# Altium PCB A3000_8MB.pcbdoc (part 1 of 3)
Units mil, origin at the board's own origin, x right, y up, seen from the top; angles counter-clockwise.
Board outline 6950 x 3881 mil, 4 copper layers (TopLayer, GND, VCC, BottomLayer), stack 70.897 mil thick; 83 components, 216 nets, 829 pads, 490 vias.
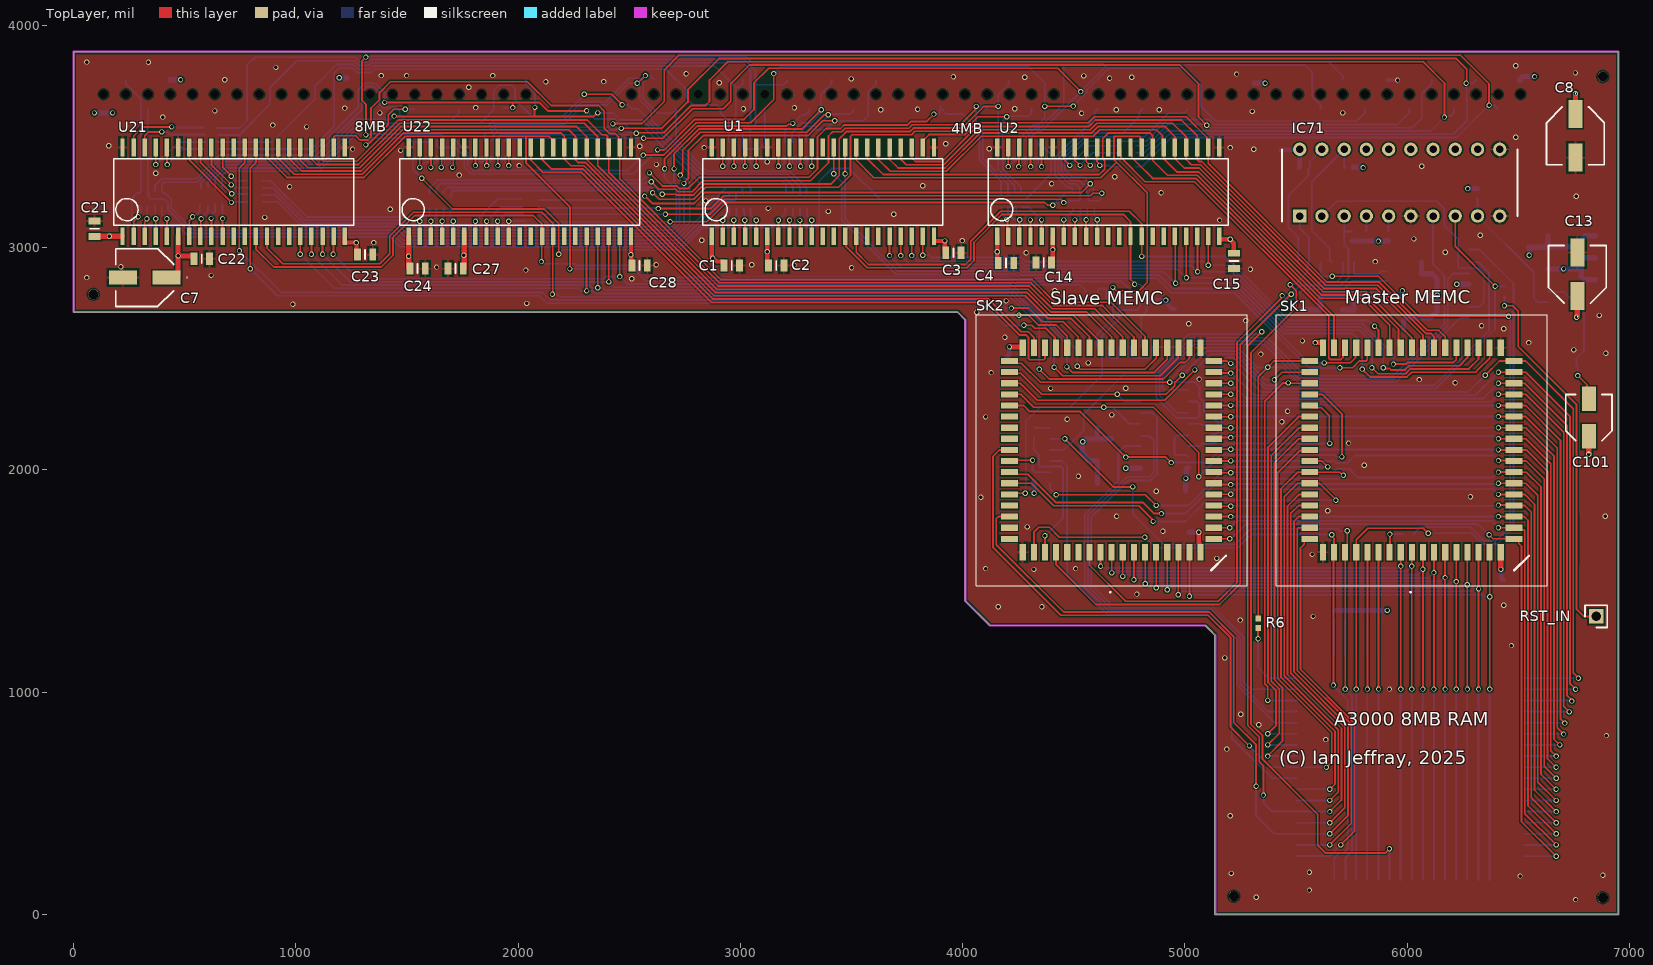
[diagram p0: TopLayer view]
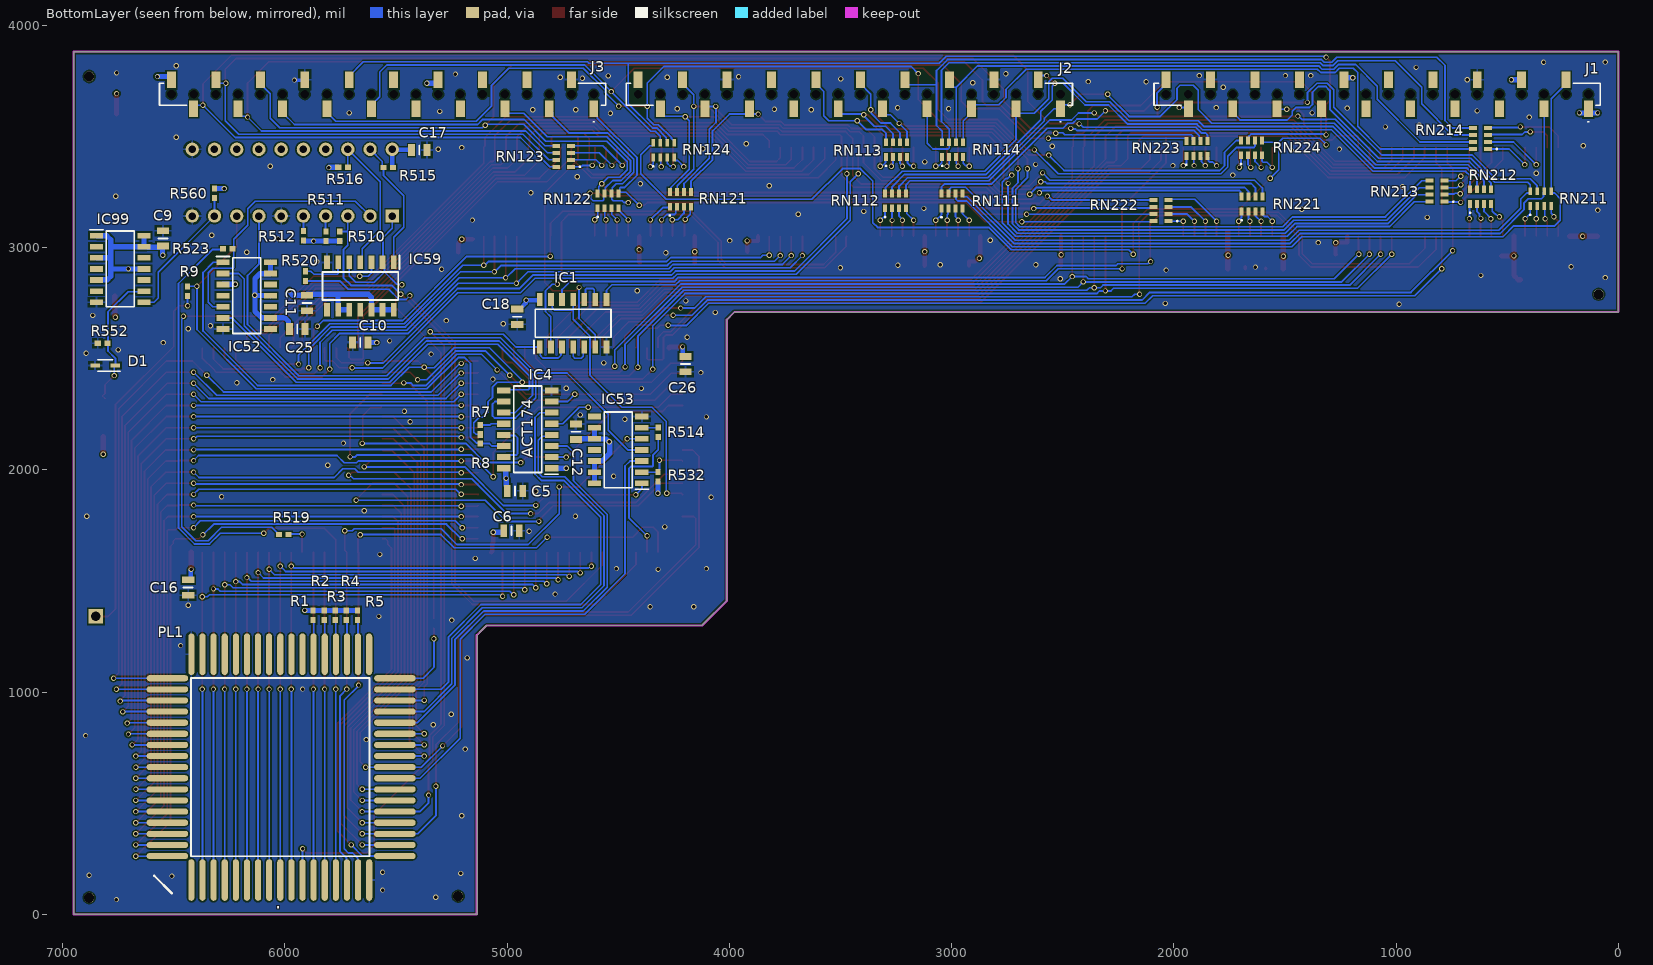
[diagram p1: BottomLayer view, seen from below]
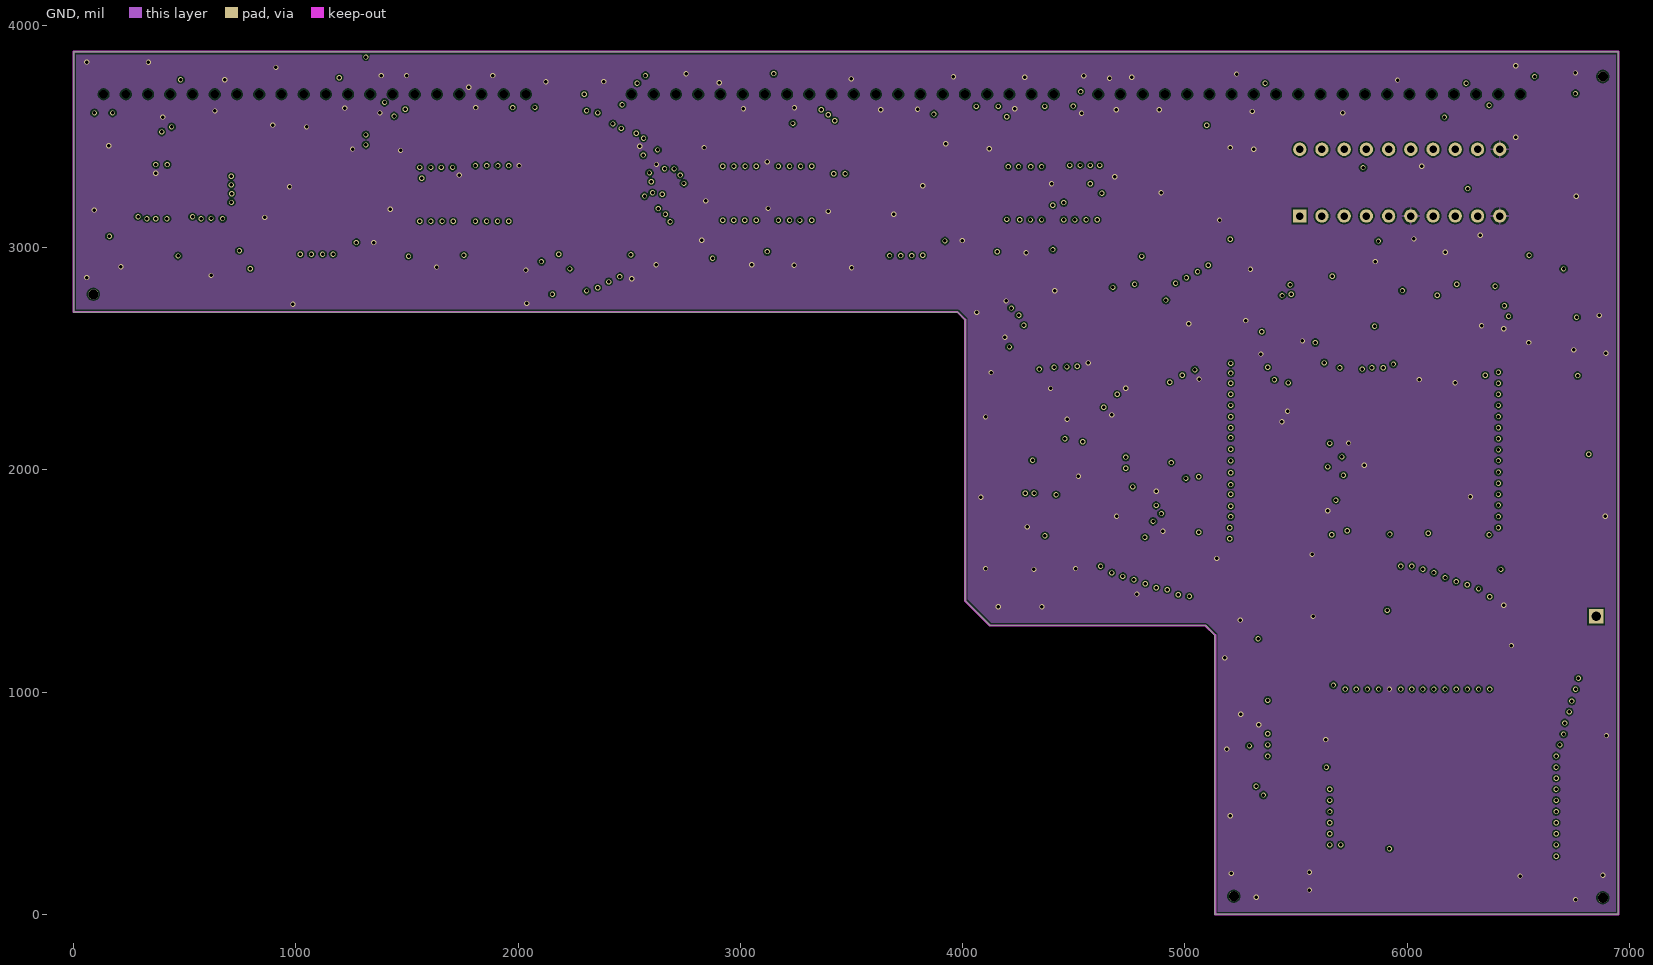
[diagram p2: GND]
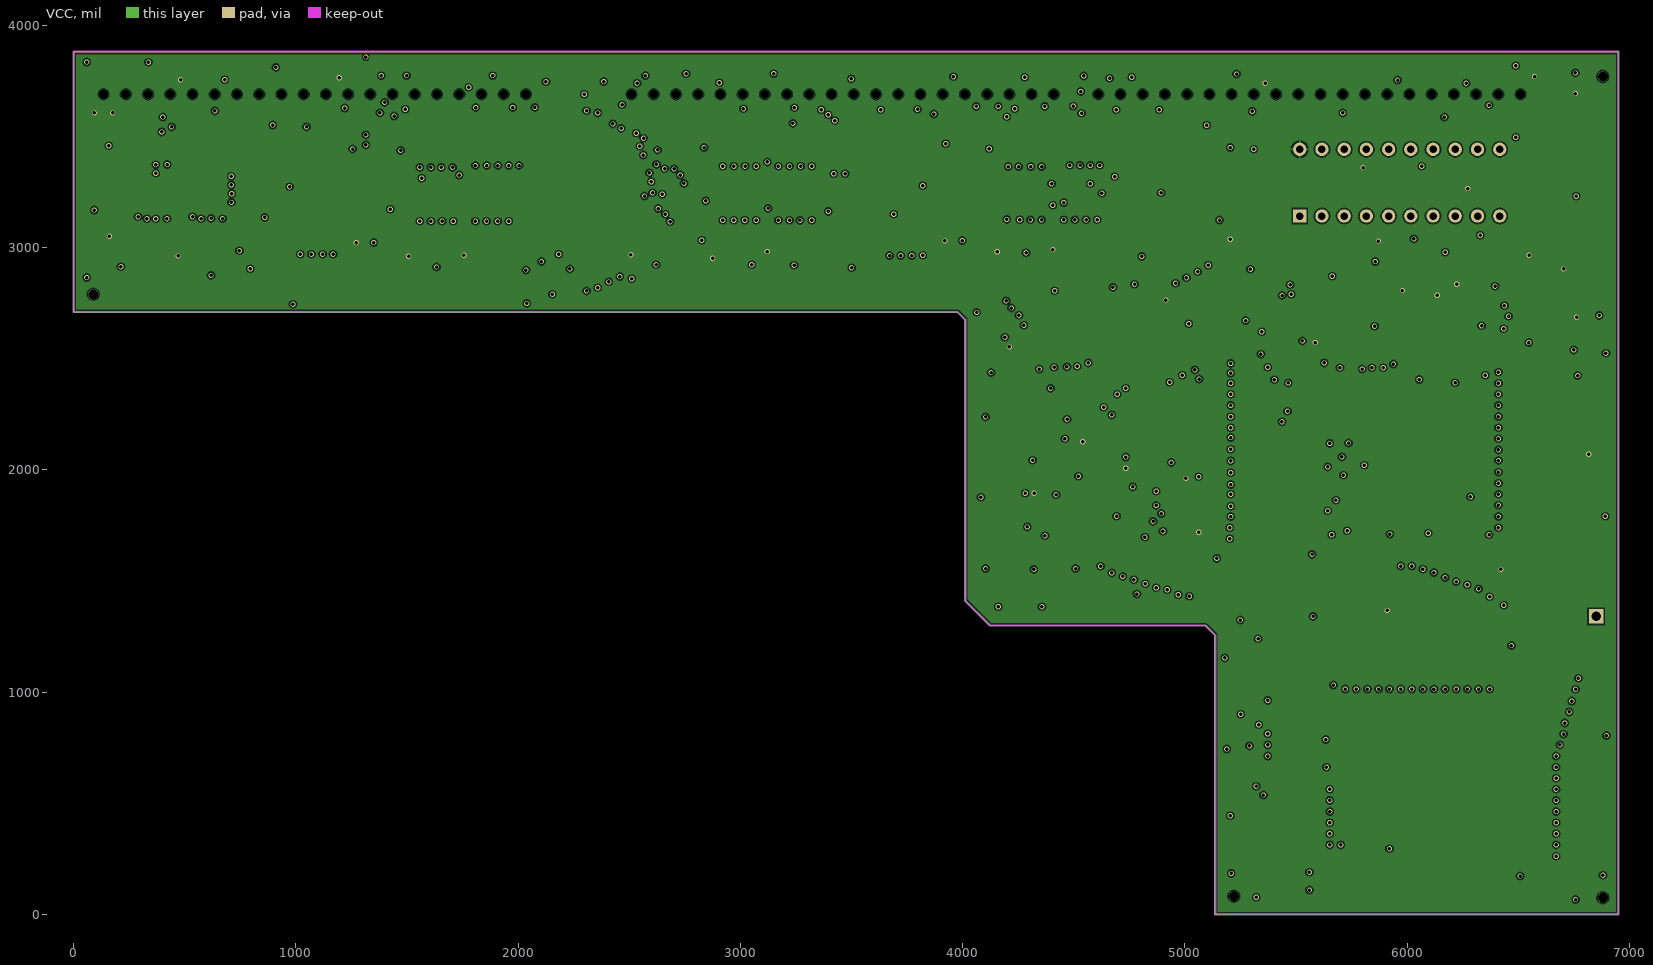
[diagram p3: VCC]
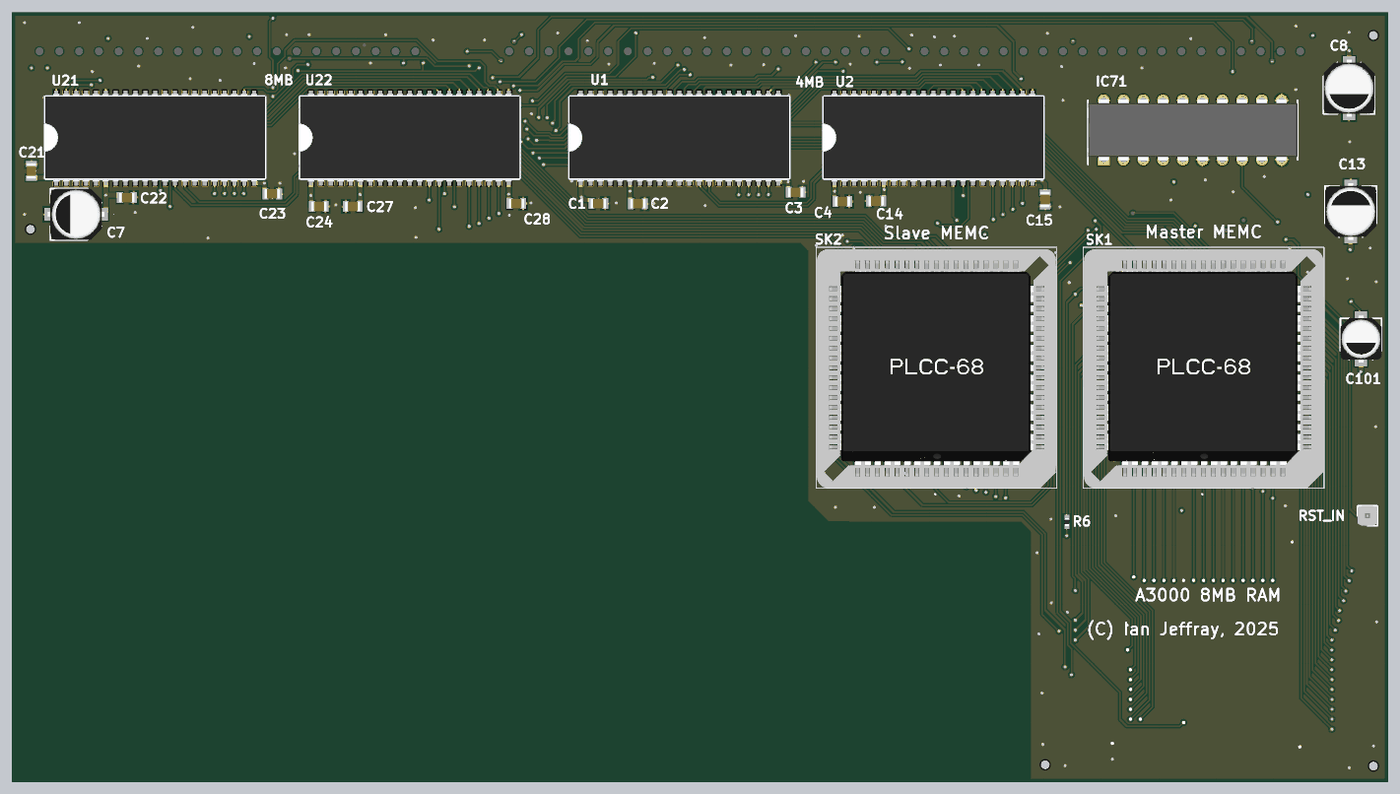
[diagram p6: 3D render of the assembled board from above, using the file's embedded part models]
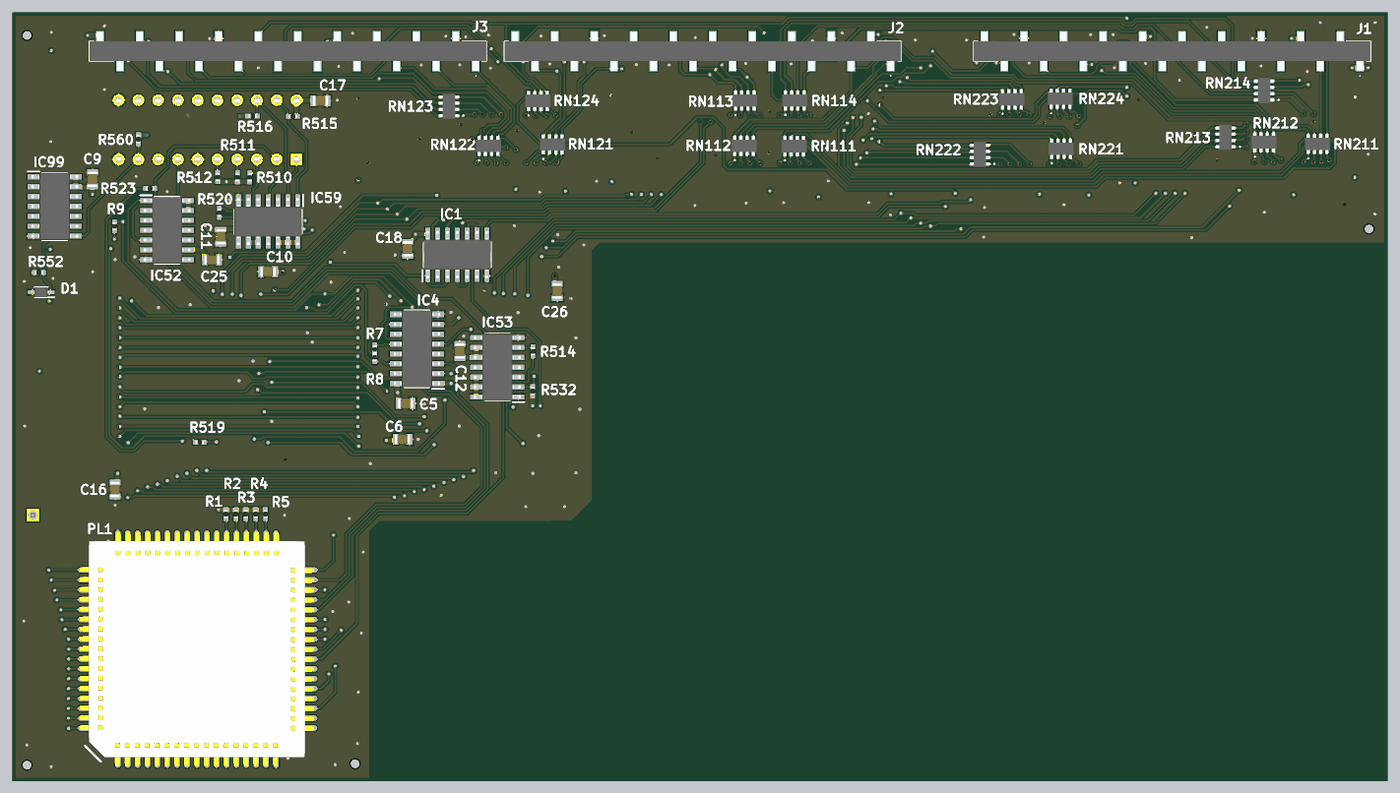
[diagram p7: 3D render of the assembled board from below, using the file's embedded part models]

## Layer stack, top to bottom
TopSolder: solder mask 0.3941, Solder Resist, Dk 3.5
TopLayer: signal copper 1.4169
Dielectric 1: prepreg 8.2, PP-022, Dk 4.5
GND: signal copper 1.378
Dielectric 4: prepreg 2.8, PP-006, Dk 4.1
Dielectric 2: core 43.3071, Core-043, Dk 4.3
Dielectric 5: prepreg 2.8, PP-006, Dk 4.1
VCC: signal copper 1.378
Dielectric 3: prepreg 8.2, PP-022, Dk 4.5
BottomLayer: signal copper 1.4169
BottomSolder: solder mask 0.3941, Solder Resist, Dk 3.5

## Board outline
4123.04,1300.96 5094.31,1299.16 5135,1254.51 5135,0 6950,0 6950,3881 0,3881 0,2710 3976,2710 4011,2675 4011,1413

## Design rules (kind name [scope] priority, off if disabled: settings)
BoardOutlineClearance [All] p1: gap=11.81 ignorepadtopadclearanceinfootprint=FALSE
Clearance [All] p1: gap=6.69 ignorepadtopadclearanceinfootprint=FALSE except(11.81: Via-Via; 19.68: Via-Hole)
ComponentClearance ComponentClearance_Z2_Z3 [(InComponent('Z2') OR InComponent('Z3')) vs InComponent('No Component')] p1: gap=0 collisioncheckmode=3 verticalgap=0 showdistances=FALSE
ComponentClearance ComponentClearance_U4_J104 [All] p2: gap=0 collisioncheckmode=3 verticalgap=0 showdistances=FALSE
ComponentClearance ComponentClearance_J3_J4 [InComponent('J3') vs InComponent('J4')] p3: gap=0 collisioncheckmode=3 verticalgap=0 showdistances=FALSE
ComponentClearance ComponentClearance_J103_J104 [InComponent('J103') vs InComponent('J104')] p4: gap=0 collisioncheckmode=3 verticalgap=0 showdistances=FALSE
ComponentClearance [All] p5: gap=10 collisioncheckmode=3 verticalgap=10 showdistances=FALSE
DiffPairsRouting [InDifferentialPairClass('All Differential Pairs')] p1: maxlimit=10 minlimit=4.51 mostfreqgap=6.69 toplayer_mingap=6.69 toplayer_minwidth=7.87 toplayer_maxwidth=15 toplayer_prefwidth=9.32 midlayer1_prefgap=4.53 midlayer1_minwidth=15 midlayer1_maxwidth=15 midlayer1_prefwidth=15 midlayer2_prefgap=4.53 midlayer2_minwidth=15 midlayer2_maxwidth=15 midlayer2_prefwidth=15 bottomlayer_mingap=6.69 bottomlayer_minwidth=7.87 bottomlayer_maxwidth=15 bottomlayer_prefwidth=9.32 maxuncoupledlength=500
FabricationTestPointUsage TestPointUsage [All] p1: valid=0 allowmultiple=FALSE
FabricationTestpoint Testpoint [All] p1: side=3 testpointundercomponent=TRUE minsize=40 maxsize=100 preferedsize=60 minholesize=20 maxholesize=40 preferedholesize=32 testpointgrid=1 allowsidetop=TRUE allowsidebottom=TRUE usegrid=TRUE gridtolerance=0.01
HoleSize [All] p1: absolutevalues=TRUE maxlimit=196.85 minlimit=15.75 maxpercent=80.000 minpercent=20.000
HoleToHoleClearance [All] p1: gap=9.84 allowstackedmicrovias=FALSE
MinimumSolderMaskSliver [All] p1: minsoldermaskwidth=0.79
PlaneClearance [All] p1: clearance=7.87
PlaneConnect [All] p1: pad.planeconnectstyle=Relief pad.reliefexpansion=20 pad.reliefentries=4 pad.reliefconductorwidth=10 pad.reliefairgap=10 via.planeconnectstyle=Direct via.reliefexpansion=20 via.reliefentries=4 via.reliefconductorwidth=10 via.reliefairgap=10
PolygonConnect [All] p1: thpad.connectstyle=Relief thpad.reliefconductorwidth=10 thpad.reliefentries=4 thpad.polygonreliefangle="90 Angle" thpad.airgapwidth=10 smdpad.connectstyle=Relief smdpad.reliefconductorwidth=10 smdpad.reliefentries=4 smdpad.polygonreliefangle="90 Angle" smdpad.airgapwidth=10 via.connectstyle=Direct via.reliefconductorwidth=10 via.reliefentries=4 via.polygonreliefangle="90 Angle" via.airgapwidth=10
RoutingVias [All] p1: holewidth=15.75 width=31.5 viastyle="Through Hole" minholewidth=15.75 minwidth=23.62 maxholewidth=15.75 maxwidth=31.5
SilkToSilkClearance [All] p1: silktosilkclearance=3.94
SilkToSolderMaskClearance SilkscreenOverComponentPads [IsPad] p1: minsilkscreentomaskgap=3.94 clearancetoexposedcopper=TRUE
SolderMaskExpansion [All] p1: expansion=2.95 istentingtop=FALSE
SupplyNets "Schematic Supply Nets_1" [InNet('GND')] p1: voltage=0.000
SupplyNets "Schematic Supply Nets" [InNet('VCC')] p2: voltage=0.000
Width [All] p1: maxlimit=196.85 minlimit=5.91 preferedwidth=7.87
19 further rules are at their usual default settings.

## Classes and differential pairs
component class A3000_8MB_Glue: C101 D1 IC1 IC4 IC52 IC53 IC59 IC71 IC99 R7 R8 R9 R510 R511 R512 R514 R515 R516 R519 R520 R523 R532 R552 R560 RST_IN
component class A3000_8MB_Slave: C21 C22 C23 C24 C25 C26 C27 C28 RN211 RN212 RN213 RN214 RN221 RN222 RN223 RN224 SK2 U21 U22
component class A3000_8MB: C1 C2 C3 C4 C5 C6 C7 C8 C9 C10 C11 C12 C13 C14 C15 C16 C17 C18 J1 J2 J3 R1 R2 R3 R4 R5 R6 RN111 RN112 RN113 RN114 RN121 RN122 RN123 RN124 SK1 U1 U2

## Components (designator, comment, footprint, x,y, rotation, side; value= is the part's Value field where it differs from the comment)
C1 "100nF" 0805cap 2960.84,2920.01 r0 top
C2 "100nF" 0805cap 3160.84,2919.37 r0 top
C3 "100nF" 0805cap 3958.37,2976.97 r0 top
C4 "100nF" 0805cap 4195,2930.24 r0 top
C5 "100nF" 0805cap 4964.29,1905.92 r180 bottom
C6 "100nF" 0805cap 4980,1726.22 r180 bottom
C7 "47uF" EEE1AA101SP 320,2865.6 r180 top
C8 "47uF" EEE1AA101SP 6756.87,3503.41 r270 top
C9 "100nF" 0805cap 6548.25,3041.43 r90 bottom
C10 "100nF" 0805cap 5660,2573.45 r0 bottom
C11 "100nF" 0805cap 5900,2750.89 r270 bottom
C12 "100nF" 0805cap 4689.79,2172.22 r90 bottom
C13 "47uF" EEE1AA101SP 6765.41,2880.01 r90 top
C14 "100nF" 0805cap 4365,2932.99 r180 top
C15 "100nF" 0805cap 5220,2940.47 r270 top
C16 "100nF" 0805cap 6434.62,1470.94 r270 bottom
C17 "100nF" 0805cap 5395,3439 r180 bottom
C18 "100nF" 0805cap 4953.94,2689.5 r270 bottom
C21 "100nF" 0805cap 93.84,3085 r90 top
C22 "100nF" 0805cap 576.56,2950 r0 top
C23 "100nF" 0805cap 1311.47,2968.9 r0 top
C24 "100nF" 0805cap 1547.64,2905.63 r0 top
C25 "100nF" 0805cap 5944.02,2633.94 r180 bottom
C26 "100nF" 0805cap 4197.13,2476.22 r270 bottom
C27 "100nF" 0805cap 1718.66,2905.63 r180 top
C28 "100nF" 0805cap 2546.36,2919.68 r0 top
C101 "10uF" EEE0GA101SR 6817,2235.31 r90 top
D1 "1N4148WS-7-F" SOD2513X120N 6807.72,2470 r0 bottom
IC1 "SN74AC04D" SOIC127P600X175-14N 4702.58,2660 r90 bottom
IC4 "CD74ACT174M96" SOIC127P600X175-16N 4907.06,2182.8 r0 bottom
IC52 "SN74AC04D" SOIC127P600X175-14N 6170.84,2783.94 r180 bottom locked
IC53 "CD74ACT08M" SOIC127P600X175-14N 4500,2090 r0 bottom locked
IC59 "CD74AC32M" SOIC127P600X175-14N 5660,2827.65 r270 bottom locked
IC71 "ATF16V8C" DIP762W66P254L2692H508Q20N 5966.23,3292.28 r90 top locked
IC99 "SN74HCT14DR" SOIC127P600X175-14N 6740,2904.22 r180 bottom
J1 "M20-7862042" M207862042 1085,3690 r0 bottom locked
J2 "M20-7862042" M207862042 3460,3690 r0 bottom locked
J3 "M20-7862042" M207862042 5560,3690 r0 bottom locked
PL1 "MEMC motherboard plug" MEMC_Plug 6020.16,662.8 r180 bottom locked
R1 "10K" RESC1005X40N 5872.89,1346.1 r270 bottom
R2 "10K" RESC1005X40N 5822.89,1346.1 r270 bottom
R3 "10K" RESC1005X40N 5772.89,1346.1 r270 bottom
R4 "10K" RESC1005X40N 5722.89,1346.1 r270 bottom
R5 "10K" RESC1005X40N 5672.89,1346.1 r270 bottom
R6 "33R" RESC1005X40N 5330,1310 r90 top
R7 "33R" RESC1005X40N 5120,2180.1 r270 bottom
R8 "33R" RESC1005X40N 5120,2140.41 r270 bottom
R9 "33R" RESC1005X40N 6437.45,2804.22 r90 bottom
R510 "10K" RESC1005X40N 5752.39,3051.1 r270 bottom
R511 "10K" RESC1005X40N 5814.97,3051.1 r270 bottom
R512 "10K" RESC1005X40N 5915.96,3053.24 r270 bottom
R514 "33R" RESC1005X40N 4320,2170 r90 bottom
R515 "1K" RESC1005X40N 5534.52,3360.31 r180 bottom
R516 "1K" RESC1005X40N 5737.89,3361.33 r0 bottom
R519 "68R" RESC1005X40N 6004.95,1710 r0 bottom
R520 "68R" RESC1005X40N 5907.06,2872.13 r90 bottom
R523 "68R" RESC1005X40N 6257.06,2995.55 r0 bottom
R532 "10K" RESC1005X40N 4321.16,1969.72 r270 bottom
R552 "47K" RESC1005X40N 6820,2570 r0 bottom
R560 "10K" RESC1005X40N 6316.23,3244.23 r90 bottom
RN111 "YC164-JR-0768RL" YC164JR0768RL 2998,3209.55 r180 bottom
RN112 "YC164-JR-0768RL" YC164JR0768RL 3252,3210.87 r180 bottom
RN113 "YC164-JR-0768RL" YC164JR0768RL 3247.85,3440.55 r180 bottom
RN114 "YC164-JR-0768RL" YC164JR0768RL 2995,3440.55 r180 bottom
RN121 "YC164-JR-0768RL" YC164JR0768RL 4220,3217.58 r180 bottom
RN122 "YC164-JR-0768RL" YC164JR0768RL 4545,3210.87 r180 bottom
RN123 "YC164-JR-0768RL" YC164JR0768RL 4745,3411.1 r90 bottom
RN124 "YC164-JR-0768RL" YC164JR0768RL 4295,3438.66 r180 bottom
RN211 "YC164-JR-0768RL" YC164JR0768RL 349.39,3220.55 r180 bottom
RN212 "YC164-JR-0768RL" YC164JR0768RL 620,3229.41 r180 bottom
RN213 "YC164-JR-0768RL" YC164JR0768RL 815.49,3254.02 r90 bottom
RN214 "YC164-JR-0768RL" YC164JR0768RL 620,3491.1 r90 bottom
RN221 "YC164-JR-0768RL" YC164JR0768RL 1647.64,3195.95 r180 bottom
RN222 "YC164-JR-0768RL" YC164JR0768RL 2057.64,3166.91 r90 bottom
RN223 "YC164-JR-0768RL" YC164JR0768RL 1896.18,3446.3 r180 bottom
RN224 "YC164-JR-0768RL" YC164JR0768RL 1650.75,3449.17 r180 bottom
RST_IN "90120-0761" HDRV1W90P0X254_1X1_232X249X560P 6850,1341.1 r90 top
SK1 "Master MEMC socket" MEMC_Socket 6020.84,2090 r180 top locked
SK2 "Slave MEMC socket" MEMC_Socket 4670.31,2090 r180 top locked
U1 "IS41C16105C" SOJ-42 3370.84,3251.1 r0 top locked
U2 "IS41C16105C" SOJ-42 4655,3251.1 r0 top locked
U21 "IS41C16105C" SOJ-42 720,3251.1 r0 top locked
U22 "IS41C16105C" SOJ-42 2007.64,3251.1 r0 top locked

## Footprints (in the part's own frame and the unit in brackets; to place one, negate y for a bottom-side part, rotate by r counter-clockwise, add the part's x,y. Pads: shape width x height; smd on the part's side, far side on the other; paste and mask are expansions set on the pad)
0805cap [mm]
  rect 0.78x1.39 smd: 1(-0.88,0) 2(0.88,0)
  silkscreen extent 0,-0.53 0,0.53, body extent -1,-0.63 1,0.63, height 0.6
DIP762W66P254L2692H508Q20N [mil]
  rect 60x60 hole 33.86: 1(-150,450)
  round 60 hole 33.86: 2(-150,350) 3(-150,250) 4(-150,150) 5(-150,50) 6(-150,-50) 7(-150,-150) 8(-150,-250) 9(-150,-350) 10(-150,-450) 11(150,-450) 12(150,-350) 13(150,-250) 14(150,-150) 15(150,-50) 16(150,50) 17(150,150) 18(150,250) 19(150,350) 20(150,450)
  silkscreen extent -175,-530 150,530, body extent -156,-530 156,530, height 200
EEE0GA101SR [mm]
  rect 2.8x1.6 smd: 1(-2.15,0) 2(2.15,0)
  silkscreen extent -4.03,-2.65 2.65,2.65, body extent -3,-2.65 3,2.65, height 5.8
EEE1AA101SP [mm]
  rect 3.2x1.6 smd: 1(-2.5,0) 2(2.5,0)
  silkscreen extent -4.88,-3.3 3.3,3.3, body extent 0,0 0,0
HDRV1W90P0X254_1X1_232X249X560P [mm]
  rect 1.65x1.65 hole 1.1: 1(0,0)
  silkscreen extent -1.27,-1.27 1.27,1.27, body extent -1.27,-1.25 1.27,1.25, height 5.37
M207862042 [mm]
  rect 1.02x1.9 smd: 1(-24.13,1.65) 2(-21.59,-1.65) 3(-19.05,1.65) 4(-16.51,-1.65) 5(-13.97,1.65) 6(-11.43,-1.65) 7(-8.89,1.65) 8(-6.35,-1.65) 9(-3.81,1.65) 10(-1.27,-1.65) 11(1.27,1.65) 12(3.81,-1.65) 13(6.35,1.65) 14(8.89,-1.65) 15(11.43,1.65) 16(13.97,-1.65) 17(16.51,1.65) 18(19.05,-1.65) 19(21.59,1.65) 20(24.13,-1.65)
  round 0.5 hole 1 unplated: 21(-24.13,0) 22(-21.59,0) 23(-19.05,0) 24(-16.51,0) 25(-13.97,0) 26(-11.43,0) 27(-8.89,0) 28(-6.35,0) 29(-3.81,0) 30(-1.27,0) 31(1.27,0) 32(3.81,0) 33(6.35,0) 34(8.89,0) 35(11.43,0) 36(13.97,0) 37(16.51,0) 38(19.05,0) 39(21.59,0) 40(24.13,0)
  silkscreen extent -25.5,-1.25 25.5,3.2, body extent -25.5,-2.5 25.5,2.5, height 8.1
MEMC_Plug [mm]
  rrect100% 0.7x4.75 smd: 1(0,-12.9) 2(-1.27,-12.9) 3(-2.54,-12.9) 4(-3.81,-12.9) 5(-5.08,-12.9) 6(-6.35,-12.9) 7(-7.62,-12.9) 8(-8.89,-12.9) 9(-10.16,-12.9) 27(-10.16,12.9) 28(-8.89,12.9) 29(-7.62,12.9) 30(-6.35,12.9) 31(-5.08,12.9) 32(-3.81,12.9) 33(-2.54,12.9) 34(-1.27,12.9) 35(0,12.9) 36(1.27,12.9) 37(2.54,12.9) 38(3.81,12.9) 39(5.08,12.9) 40(6.35,12.9) 41(7.62,12.9) 42(8.89,12.9) 43(10.16,12.9) 61(10.16,-12.9) 62(8.89,-12.9) 63(7.62,-12.9) 64(6.35,-12.9) 65(5.08,-12.9) 66(3.81,-12.9) 67(2.54,-12.9) 68(1.27,-12.9)
  rrect100% 4.75x0.7 smd: 10(-12.9,-10.16) 11(-12.9,-8.89) 12(-12.9,-7.62) 13(-12.9,-6.35) 14(-12.9,-5.08) 15(-12.9,-3.81) 16(-12.9,-2.54) 17(-12.9,-1.27) 18(-12.9,0) 19(-12.9,1.27) 20(-12.9,2.54) 21(-12.9,3.81) 22(-12.9,5.08) 23(-12.9,6.35) 24(-12.9,7.62) 25(-12.9,8.89) 26(-12.9,10.16) 44(13.1,10.16) 45(13.1,8.89) 46(13.1,7.62) 47(13.1,6.35) 48(13.1,5.08) 49(13.1,3.81) 50(13.1,2.54) 51(13.1,1.27) 52(13.1,0) 53(13.1,-1.27) 54(13.1,-2.54) 55(13.1,-3.81) 56(13.1,-5.08) 57(13.1,-6.35) 58(13.1,-7.62) 59(13.1,-8.89) 60(13.1,-10.16)
  silkscreen extent -10.19,-10.19 10.19,10.19, body extent -15.07,-15.07 15.06,15.06, height 7.21
MEMC_Socket [mm]
  rect 0.7x1.91 smd: 1(0,11.68) 2(-1.27,11.68) 3(-2.54,11.68) 4(-3.81,11.68) 5(-5.08,11.68) 6(-6.35,11.68) 7(-7.62,11.68) 8(-8.89,11.68) 9(-10.16,11.68) 27(-10.16,-11.68) 28(-8.89,-11.68) 29(-7.62,-11.68) 30(-6.35,-11.68) 31(-5.08,-11.68) 32(-3.81,-11.68) 33(-2.54,-11.68) 34(-1.27,-11.68) 35(0,-11.68) 36(1.27,-11.68) 37(2.54,-11.68) 38(3.81,-11.68) 39(5.08,-11.68) 40(6.35,-11.68) 41(7.62,-11.68) 42(8.89,-11.68) 43(10.16,-11.68) 61(10.16,11.68) 62(8.89,11.68) 63(7.62,11.68) 64(6.35,11.68) 65(5.08,11.68) 66(3.81,11.68) 67(2.54,11.68) 68(1.27,11.68)
  rect 1.91x0.7 smd: 10(-11.68,10.16) 11(-11.68,8.89) 12(-11.68,7.62) 13(-11.68,6.35) 14(-11.68,5.08) 15(-11.68,3.81) 16(-11.68,2.54) 17(-11.68,1.27) 18(-11.68,0) 19(-11.68,-1.27) 20(-11.68,-2.54) 21(-11.68,-3.81) 22(-11.68,-5.08) 23(-11.68,-6.35) 24(-11.68,-7.62) 25(-11.68,-8.89) 26(-11.68,-10.16) 44(11.68,-10.16) 45(11.68,-8.89) 46(11.68,-7.62) 47(11.68,-6.35) 48(11.68,-5.08) 49(11.68,-3.81) 50(11.68,-2.54) 51(11.68,-1.27) 52(11.68,0) 53(11.68,1.27) 54(11.68,2.54) 55(11.68,3.81) 56(11.68,5.08) 57(11.68,6.35) 58(11.68,7.62) 59(11.68,8.89) 60(11.68,10.16)
  silkscreen extent -15.48,-15.47 15.47,16.3, body extent -15.37,-15.24 15.37,15.47, height 5.08
RESC1005X40N [mm]
  rect 0.7x0.6 smd: 1(-0.55,0) 2(0.55,0)
  body extent -0.5,-0.25 0.5,0.25, height 0.4
SOD2513X120N [mm]
  rect 1.075x0.5 smd: 1(-1.162,0) 2(1.162,0)
  silkscreen extent -1.7,-0.65 0.85,0.65, body extent -1.25,-0.65 1.25,0.65, height 1.2
SOIC127P600X175-14N [mm]
  rect 1.525x0.65 smd: 1(-2.712,3.81) 2(-2.712,2.54) 3(-2.712,1.27) 4(-2.712,0) 5(-2.712,-1.27) 6(-2.712,-2.54) 7(-2.712,-3.81) 8(2.712,-3.81) 9(2.712,-2.54) 10(2.712,-1.27) 11(2.712,0) 12(2.712,1.27) 13(2.712,2.54) 14(2.712,3.81)
  silkscreen extent -3.48,-4.33 1.6,4.48, body extent -3,-4.33 3,4.33, height 1.75
SOIC127P600X175-16N [mm]
  rect 1.55x0.7 smd: 1(-2.725,4.445) 2(-2.725,3.175) 3(-2.725,1.905) 4(-2.725,0.635) 5(-2.725,-0.635) 6(-2.725,-1.905) 7(-2.725,-3.175) 8(-2.725,-4.445) 9(2.725,-4.445) 10(2.725,-3.175) 11(2.725,-1.905) 12(2.725,-0.635) 13(2.725,0.635) 14(2.725,1.905) 15(2.725,3.175) 16(2.725,4.445)
  silkscreen extent -3.5,-4.95 1.6,5.15, body extent -3,-4.95 3,4.95, height 1.75
SOJ-42 [mil]
  rect 20x80 smd mask+7.87: 1(-500,-200) 2(-450,-200) 3(-400,-200) 4(-350,-200) 5(-300,-200) 6(-250,-200) 7(-200,-200) 8(-150,-200) 9(-100,-200) 10(-50,-200) 11(0,-200) 12(50,-200) 13(100,-200) 14(150,-200) 15(200,-200) 16(250,-200) 17(300,-200) 18(350,-200) 19(400,-200) 20(450,-200) 21(500,-200) 22(500,200) 23(450,200) 24(400,200) 25(350,200) 26(300,200) 27(250,200) 28(200,200) 29(150,200) 30(100,200) 31(50,200) 32(0,200) 33(-50,200) 34(-100,200) 35(-150,200) 36(-200,200) 37(-250,200) 38(-300,200) 39(-350,200) 40(-400,200) 41(-450,200) 42(-500,200)
  silkscreen extent -540,-150 540,150, body extent -563,-220 563,225, height 149
YC164JR0768RL [mm]
  rect 0.45x0.9 smd: 1(-1.2,-0.85) 2(-0.4,-0.85) 3(0.4,-0.85) 4(1.2,-0.85) 5(1.2,0.85) 6(0.4,0.85) 7(-0.4,0.85) 8(-1.2,0.85)
  silkscreen extent -1.25,-1.9 -1.15,-1.8, body extent -1.6,-1.25 1.6,1.25, height 0.8

## Part data
C1 C2 C3 C4 C5 C6 C9 C10 C11 C12 C14 C15 C16 C17 C18 C21 C22 C23 C24 C25 C26 C27 C28: library part 100nF0805, "Capacitor", Arrow Part Number=C2012X7R1H104K125AM, LCSC Part #=C111492, Manufacturer_Name=TDK, Mouser Part Number=810-C2012X7R1H104KT5, Arrow Price/Stock=https://www.arrow.com/en/products/c2012x7r1h104k125am/tdk, Datasheet Link=https://product.tdk.com/info/en/catalog/datasheets/mlcc_commercial_midvoltage_en.pdf, Height=1.45mm, Manufacturer_Part_Number=C2012X7R1H104K125AM, Mouser Price/Stock=https://www.mouser.com/Search/Refine.aspx?Keyword=810-C2012X7R1H104KT5
C7 C8 C13: library part EEE1VA470WP, "Capacitor Polarised", Manufacturer_Name=Panasonic, Datasheet Link=http://industrial.panasonic.com/cdbs/www-data/pdf/RDE0000/ABA0000C1145.pdf, Height=7.8mm, Manufacturer_Part_Number=EEE1VA470WP
C101: library part EEE-1EA100SR, "Capacitor Polarised", Manufacturer_Name=Panasonic, Mouser Part Number=667-EEE-1EA100SR, Arrow Part Number=EEE-1EA100SR, Arrow Price/Stock=https://www.arrow.com/en/products/eee-1ea100sr/panasonic?region=nac, Datasheet Link=http://industrial.panasonic.com/cdbs/www-data/pdf/RDE0000/ABA0000C1145.pdf, Height=6.5mm, Manufacturer_Part_Number=EEE-1EA100SR, Mouser Price/Stock=https://www.mouser.co.uk/ProductDetail/Panasonic/EEE-1EA100SR?qs=ANJC8C65Mw4%2Fvo1GoepKcQ%3D%3D
D1: "Diode", LCSC Part #=C2128, Manufacturer_Name="Diodes Inc.", Mouser Part Number=621-1N4148WS-F, Arrow Part Number=1N4148WS-7-F, Arrow Price/Stock=https://www.arrow.com/en/products/1n4148ws-7-f/diodes-incorporated?region=asia, Datasheet Link=https://componentsearchengine.com/Datasheets/2/1N4148WS-7-F.pdf, Height=1.2mm, Manufacturer_Part_Number=1N4148WS-7-F, Mouser Price/Stock=https://www.mouser.co.uk/ProductDetail/Diodes-Incorporated/1N4148WS-7-F?qs=4drIV0IxA0r8aNy7%2Fu4kVw%3D%3D
IC1 IC52: "Integrated Circuit", LCSC Part #=C352940, Manufacturer_Name="Texas Instruments", Mouser Part Number=595-SN74AC04D, Arrow Part Number=SN74AC04D, Arrow Price/Stock=https://www.arrow.com/en/products/sn74ac04d/texas-instruments?region=nac, Datasheet Link=http://www.ti.com/lit/ds/symlink/sn74ac04.pdf, Height=1.75mm, Manufacturer_Part_Number=SN74AC04D, Mouser Price/Stock=https://www.mouser.co.uk/ProductDetail/Texas-Instruments/SN74AC04D?qs=w32V8uFkMxkvsyMHHacuZw%3D%3D
IC4: "Integrated Circuit", Manufacturer_Name="Texas Instruments", Mouser Part Number=595-CD74ACT174M96, Datasheet Link=http://www.ti.com/lit/gpn/cd74act174, Height=1.75mm, Manufacturer_Part_Number=CD74ACT174M96, Mouser Price/Stock=https://www.mouser.co.uk/ProductDetail/Texas-Instruments/CD74ACT174M96?qs=w32V8uFkMxkDXs1ka6HDkg%3D%3D
IC53: "Integrated Circuit", LCSC Part #=C233452, Manufacturer_Name="Texas Instruments", Mouser Part Number=595-CD74ACT08M, Datasheet Link=http://www.ti.com/lit/ds/symlink/cd74act08.pdf, Height=1.75mm, Manufacturer_Part_Number=CD74ACT08M, Mouser Price/Stock=https://www.mouser.co.uk/ProductDetail/Texas-Instruments/CD74ACT08M?qs=Dqy2GfToSoQdsNWXM2phYA%3D%3D
IC59: "Integrated Circuit", LCSC Part #=C352943, Manufacturer_Name="Texas Instruments", Mouser Part Number=595-CD74AC32M, Arrow Part Number=CD74AC32M, Arrow Price/Stock=https://www.arrow.com/en/products/cd74ac32m/texas-instruments, Datasheet Link=http://www.ti.com/lit/ds/symlink/cd74ac32.pdf, Height=1.75mm, Manufacturer_Part_Number=CD74AC32M, Mouser Price/Stock=https://www.mouser.co.uk/ProductDetail/Texas-Instruments/CD74AC32M?qs=OorDGPQ79Eqsy7tzrsTtUg%3D%3D
IC71: library part PAL16R4AMJ, "Integrated Circuit", Manufacturer_Name="Texas Instruments", Mouser Part Number=595-PAL16R4AMJ, Datasheet Link=http://www.ti.com/lit/ds/symlink/pal16r4am.pdf, Height=5.08mm, Manufacturer_Part_Number=PAL16R4AMJ, Mouser Price/Stock=https://www.mouser.com/Search/Refine.aspx?Keyword=595-PAL16R4AMJ
IC99: "Integrated Circuit", LCSC Part #=C6769, Manufacturer_Name="Texas Instruments", Mouser Part Number=595-SN74HCT14DR, Arrow Part Number=SN74HCT14DR, Arrow Price/Stock=https://www.arrow.com/en/products/sn74hct14dr/texas-instruments?region=nac, Datasheet Link=http://www.ti.com/lit/ds/symlink/sn74hct14.pdf, Height=1.75mm, Manufacturer_Part_Number=SN74HCT14DR, Mouser Price/Stock=https://www.mouser.co.uk/ProductDetail/Texas-Instruments/SN74HCT14DR?qs=SL3LIuy2dWxogEVGE105Iw%3D%3D
J1 J2 J3: "Connector", Manufacturer_Name=Harwin, Mouser Part Number=855-M20-7862042, Datasheet Link=https://cdn.harwin.com/pdfs/M20-786.pdf, Height=8mm, Manufacturer_Part_Number=M20-7862042, Mouser Price/Stock=https://www.mouser.co.uk/ProductDetail/Harwin/M20-7862042?qs=l5IOXVh7iozhFLf%252B9355XQ%3D%3D
PL1: library part MEMC_Plug, "MEMC plug"
R1 R2 R3 R4 R5 R510 R511 R512 R532 R560: library part CRCW040210K0FKEDHP, "Resistor", LCSC Part #=C71617, Manufacturer_Name=Vishay, Mouser Part Number=71-CRCW040210K0FKEDH, Arrow Part Number=CRCW040210K0FKEDHP, Arrow Price/Stock=https://www.arrow.com/en/products/crcw040210k0fkedhp/vishay?region=nac, Datasheet Link=http://www.vishay.com/docs/20035/dcrcwe3.pdf, Height=0.4mm, Manufacturer_Part_Number=CRCW040210K0FKEDHP, Mouser Price/Stock=https://www.mouser.co.uk/ProductDetail/Vishay-Dale/CRCW040210K0FKEDHP?qs=FlFvgi4rxBxmIiaeyFjrkA%3D%3D
R6 R7 R8 R9 R514: library part CRCW040233R0FKED, "Resistor", LCSC Part #=C137880, Manufacturer_Name=Vishay, Mouser Part Number=71-CRCW0402-33-E3, Arrow Part Number=CRCW040233R0FKED, Arrow Price/Stock=https://www.arrow.com/en/products/crcw040233r0fked/vishay, Datasheet Link=http://www.vishay.com/docs/20035/dcrcwe3.pdf, Height=0.4mm, Manufacturer_Part_Number=CRCW040233R0FKED, Mouser Price/Stock=https://www.mouser.co.uk/ProductDetail/Vishay-Dale/CRCW040233R0FKED?qs=TNtMkGKFKOyo77UGFlXIJw%3D%3D
R515 R516: library part CRCW04021K00JNED, "Resistor", LCSC Part #=C279981, Manufacturer_Name=Vishay, Mouser Part Number=71-CRCW0402J-1.0K-E3, Arrow Part Number=CRCW04021K00JNED, Arrow Price/Stock=https://www.arrow.com/en/products/crcw04021k00jned/vishay, Datasheet Link=http://www.vishay.com/docs/20035/dcrcwe3.pdf, Height=0.4mm, Manufacturer_Part_Number=CRCW04021K00JNED, Mouser Price/Stock=https://www.mouser.co.uk/ProductDetail/Vishay-Dale/CRCW04021K00JNED?qs=YX%252BK5oaHNYpGRsHVuzxl1A%3D%3D
R519 R520 R523: library part CRCW040268R0FKEDHP, "Resistor", LCSC Part #=C163455, Manufacturer_Name=Vishay, Mouser Part Number=71-CRCW040268R0FKEDH, Arrow Part Number=CRCW040268R0FKEDHP, Arrow Price/Stock=https://www.arrow.com/en/products/crcw040268r0fkedhp/vishay, Datasheet Link=http://www.vishay.com/docs/20035/dcrcwe3.pdf, Height=0.4mm, Manufacturer_Part_Number=CRCW040268R0FKEDHP, Mouser Price/Stock=https://www.mouser.co.uk/ProductDetail/Vishay-Dale/CRCW040268R0FKEDHP?qs=YaA%252B3EhhSt26vU44iyW%252BOw%3D%3D
R552: library part CRCW040247K0FKED, "Resistor", LCSC Part #=C163440, Manufacturer_Name=Vishay, Mouser Part Number=71-CRCW0402-47K-E3, Arrow Part Number=CRCW040247K0FKED, Arrow Price/Stock=https://www.arrow.com/en/products/crcw040247k0fked/vishay, Datasheet Link=http://www.vishay.com/docs/20035/dcrcwe3.pdf, Height=0.4mm, Manufacturer_Part_Number=CRCW040247K0FKED, Mouser Price/Stock=https://www.mouser.co.uk/ProductDetail/Vishay-Dale/CRCW040247K0FKED?qs=rzhQWu8UUS0SPbmGf0DOIg%3D%3D
RN111 RN112 RN113 RN114 RN121 RN122 RN123 RN124 RN211 RN212 RN213 RN214 RN221 RN222 RN223 RN224: "Resistor Network", LCSC Part #=C695188, Manufacturer_Name=KEMET, Mouser Part Number=603-YC164-JR-0768RL, Arrow Part Number=YC164-JR-0768RL, Arrow Price/Stock=https://www.arrow.com/en/products/yc164-jr-0768rl/yageo, Datasheet Link=https://www.yageo.com/upload/media/product/productsearch/datasheet/rchip/PYu-YC_TC_group_51_RoHS_L_9.pdf, Height=0.7mm, Manufacturer_Part_Number=YC164-JR-0768RL, Mouser Price/Stock=https://www.mouser.co.uk/ProductDetail/Yageo/YC164-JR-0768RL?qs=8cPjvKtxWv7AOp%2F0jDxI3w%3D%3D
RST_IN: "Connector", Manufacturer_Name=Molex, Mouser Part Number=538-90120-0761, Datasheet Link=https://www.molex.com/pdm_docs/sd/901200761_sd.pdf, Height=5.6mm, Manufacturer_Part_Number=90120-0761, Mouser Price/Stock=https://www.mouser.co.uk/ProductDetail/Molex/90120-0761?qs=PvP5v7Eimsn%2F58TpDaAAow%3D%3D
SK1 SK2: library part MEMC_Skt, "MEMC socket", Arrow Part Number=8468-21B1-RK-TR, Manufacturer_Name=3M, Mouser Part Number=517-8468-21B1-RK-TR, Arrow Price/Stock=https://www.arrow.com/en/products/8468-21b1-rk-tr/3m, Datasheet Link=https://www.arrow.com/en/products/8468-21b1-rk-tr/3m, Height=4.6mm, Manufacturer_Part_Number=8468-21B1-RK-TR, Mouser Price/Stock=https://www.mouser.co.uk/ProductDetail/3M-Electronic-Solutions-Division/8468-21B1-RK-TR?qs=X%2F%2F06fXhnJ18zOj3KK47CQ%3D%3D
U1 U2 U21 U22: library part DRAM_1MX16_SOJ

## Free pads (board coordinates)
  round 45.35 hole 45.35 unplated paste-99999 mask+5.83: 7(89,2790) 7(5220,82) 7(6880,75.2) 7(6880,3770)

## Via types
v1: diameter 23.62, hole 15.75, TopLayer to BottomLayer, tented both sides, 490 vias

## Nets (pads, with @x,y where several pads share a name; then routed paths per layer and width w, separated by ;. In a path a pad name is that pad's centre, name@x,y a point inside that pad or via, vN(x,y) a via of type N, cw(c..) or ccw(c..) an arc to the next point about the centre after c; other vN are vias at no path point)
A0: PL1.26 SK1.26 SK2.26 | length 3287.7
  TopLayer w7.87: SK2.26@5130.15,2490 5188.92,2490 5199.87,2479.06 v1(5206.26,2479.06) ; v1(6351.14,2426.22) 6414.92,2490 SK1.26@6480.68,2490 6532.71,2490 6747.4,2275.31 6747.4,1798.7 ; 6747.4,1581.3 6747.4,1088.15 6770.16,1065.39 v1(6770.16,1062.8) ; 6747.42,1581.31 6747.42,1798.69
  BottomLayer w7.87: v1(5206.26,2479.06) 5212.65,2479.06 5341.31,2350.4 5345.86,2350.4 6275.32,2350.4 v1(6351.14,2426.22) ; PL1.26@6528.03,1062.8 v1(6770.16,1062.8) v1@6771.42,1064.06
A1: PL1.25 SK1.25 SK2.25 | length 3242.2
  TopLayer w7.87: SK2.25@5130.15,2440 5134.4,2435.75 v1(5206.26,2435.75) ; v1(6410.41,2440) SK1.25@6480.68,2440 6532.71,2440 6732.83,2239.88 6732.83,1792.67 6732.85,1587.34 ; 6732.83,1587.33 6732.83,1037.17 v1(6757.2,1012.8)
  BottomLayer w7.87: v1(5206.26,2435.75) 5210.51,2435.75 5310.43,2335.83 6306.25,2335.83 v1(6410.41,2440) ; PL1.25@6528.03,1012.8 v1(6757.2,1012.8) v1@6760,1010
A2: PL1.24 SK1.24 SK2.24 | length 3186.1
  TopLayer w7.87: SK2.24@5130.15,2390 v1(5206.26,2390) ; v1(6410.41,2390) SK1.24@6480.68,2390 6528.57,2390 6718.27,2200.31 6718.27,1786.64 ; 6718.28,1786.62 6718.28,1593.38 6718.27,986.38 6740,964.64 v1(6740,960)
  BottomLayer w7.87: v1(5206.26,2390) 5275,2321.27 6341.68,2321.27 v1(6410.41,2390) ; PL1.24@6528.03,962.8 6737.2,962.8 v1(6740,960)
A3: PL1.23 SK1.23 SK2.23 | length 3143
  TopLayer w7.87: SK2.23@5130.15,2340 v1@5204.9,2340 ; v1(6410.41,2340) SK1.23@6480.68,2340 6532.71,2340 6703.7,2169.01 6703.7,1780.6 ; 6703.7,1599.4 6703.7,936.3 v1(6728.6,911.4) ; 6703.72,1599.41 6703.72,1780.59
  BottomLayer w7.87: v1@5204.9,2340 v1(5206.26,2340) 5239.56,2306.7 6377.11,2306.7 v1(6410.41,2340) ; PL1.23@6528.03,912.8 6727.2,912.8 v1(6728.6,911.4) v1@6730,910
A4: PL1.22 SK1.22 SK2.22 | length 3087.4
  TopLayer w7.87: SK2.22@5130.15,2290 v1@5205.75,2290 ; v1(6410.41,2290) SK1.22@6480.68,2290 6533.19,2290 6689.13,2134.05 6689.13,1774.57 6689.15,1605.45 ; 6689.13,1605.43 6689.13,880.9 v1@6708.6,861.43
  BottomLayer w7.87: v1@5205.75,2290 v1(6410.41,2290) ; PL1.22@6528.03,862.8 6707.2,862.8 v1(6708.6,861.4) v1@6710,860
  other v1: 5206.26,2290
A5: PL1.21 SK1.21 SK2.21 | length 3080.9
  TopLayer w7.87: SK2.21@5130.15,2240 5131,2239.15 v1@5204.9,2239.15 ; v1(6410.41,2240) SK1.21@6480.68,2240 6533.19,2240 6674.57,2098.62 6674.57,1768.54 ; 6674.58,1768.52 6674.58,1611.48 6674.57,840.32 v1(6703.48,811.4)
  BottomLayer w7.87: v1@5204.9,2239.15 5205.75,2240 v1(6410.41,2240) ; PL1.21@6528.03,812.8 6702.09,812.8 v1(6703.48,811.4) v1@6704.88,810
  other v1: 5206.26,2239.15
A6: PL1.20 SK1.20 SK2.20 | length 3052.6
  TopLayer w7.87: SK2.20@5130.15,2190 v1@5204.9,2190 ; v1(6410.41,2190) SK1.20@6480.68,2190 6533.19,2190 6660,2063.19 6660,1762.5 ; 6660,1617.5 6660,789.57 v1(6686.77,762.8) ; 6660.01,1617.51 6660.01,1762.49
  BottomLayer w7.87: v1@5204.9,2190 v1(6410.41,2190) ; PL1.20@6528.03,762.8 v1(6686.77,762.8)
  other v1: 5206.26,2190
A7: PL1.19 SK1.19 SK2.19 | length 3038.1
  TopLayer w7.87: SK2.19@5130.15,2140 5135.92,2145.77 v1(5206.26,2145.77) ; v1(6410.41,2140) SK1.19@6480.68,2140 6533.19,2140 6645.43,2027.75 6645.43,1756.47 6645.45,1623.55 ; 6645.43,1623.53 6645.43,737.36 v1(6670,712.8)
  BottomLayer w7.87: v1(5206.26,2145.77) 5210.78,2150.29 5220.18,2150.29 5220.98,2151.08 6393.99,2151.08 6405.07,2140 v1(6410.41,2140) ; PL1.19@6528.03,712.8 v1(6670,712.8)
A8: PL1.18 SK1.18 SK2.18 | length 3032.6
  TopLayer w7.87: SK2.18@5130.15,2090 5133.16,2093.01 v1(5206.26,2093.01) ; v1(6410.41,2090) SK1.18@6480.68,2090 6535.28,2090 6630.87,1994.41 6630.87,1750.43 ; 6630.88,1750.42 6630.88,1629.58 6630.87,700.71 v1(6669.37,662.21)
  BottomLayer w7.87: v1(5206.26,2093.01) 5207.77,2091.51 6408.91,2091.51 v1(6410.41,2090) ; PL1.18@6528.03,662.8 6668.78,662.8 v1(6669.37,662.21)
A9: PL1.17 SK1.17 SK2.17 | length 3057.5
  TopLayer w7.87: SK2.17@5130.15,2040 5130.4,2040.25 v1(5206.26,2040.25) ; v1(6410.41,2042.4) 6478.29,2042.4 SK1.17@6480.68,2040 6535.28,2040 6616.3,1958.98 6616.3,1744.4 ; 6616.3,1635.6 6616.3,666.5 v1(6670,612.8) ; 6616.31,1635.61 6616.31,1744.39
  BottomLayer w7.87: v1(5206.26,2040.25) 5669,2040.25 5677.24,2032.01 5732.02,2032.01 5764.86,2064.85 6387.96,2064.85 v1(6410.41,2042.4) ; PL1.17@6528.03,612.8 v1(6670,612.8)
A10: PL1.16 SK1.16 SK2.16 | length 3063.9
  TopLayer w7.87: SK2.16@5130.15,1990 5132.65,1987.5 v1(5206.26,1987.5) ; v1(6410.41,1990.12) 6480.56,1990.12 SK1.16@6480.68,1990 6535.28,1990 6601.73,1923.54 6601.73,1738.37 6601.75,1641.65 6601.73,630.53 v1(6669.46,562.8)
  BottomLayer w7.87: v1(5206.26,1987.5) 5207.78,1989.02 5669.97,1989.02 5685.83,2004.87 5738.41,2004.87 5777.44,1965.84 5834.7,1965.84 6386.13,1965.84 v1(6410.41,1990.12) ; PL1.16@6528.03,562.8 v1(6669.46,562.8)
A11: PL1.15 SK1.15 SK2.15 | length 3033.8
  TopLayer w7.87: SK2.15@5130.15,1940 5136.06,1934.09 v1(5206.26,1934.09) ; v1(6410.41,1940) SK1.15@6480.68,1940 6533.19,1940 6587.17,1886.02 6587.17,1732.33 ; 6587.18,1732.32 6587.18,1647.68 6587.17,595.63 v1(6670,512.8)
  BottomLayer w7.87: v1(5206.26,1934.09) 5209.21,1937.05 6407.46,1937.05 v1(6410.41,1940) ; PL1.15@6528.03,512.8 v1(6670,512.8)
A12: PL1.14 SK1.14 SK2.14 | length 3045.6
  TopLayer w7.87: SK2.14@5130.15,1890 5130.54,1890.39 v1(5206.26,1890.39) ; v1(6410.41,1890) SK1.14@6480.68,1890 6528.57,1890 6572.6,1845.97 6572.6,1726.3 ; 6572.6,1653.7 6572.6,560.2 v1(6670,462.8) ; 6572.61,1653.72 6572.61,1726.28
  BottomLayer w7.87: v1(5206.26,1890.39) 5207.84,1890.39 5230.87,1913.42 6386.99,1913.42 v1(6410.41,1890) ; PL1.14@6528.03,462.8 v1(6670,462.8)
A13: PL1.13 SK1.13 SK2.13 | length 3030.2
  TopLayer w7.87: SK2.13@5130.15,1840 5134.09,1836.06 v1(5206.26,1836.06) ; v1(6410.41,1841.69) SK1.13@6480.68,1841.69 ; SK1.13@6480.68,1840 6497.87,1840 6528.57,1840 6558.03,1810.54 6558.03,1720.26 6558.05,1659.75 6558.03,524.76 v1(6670,412.8)
  BottomLayer w7.87: v1(5206.26,1836.06) 5209.07,1838.87 6407.6,1838.87 v1(6410.41,1841.69) ; PL1.13@6528.03,412.8 v1(6670,412.8)
A14: PL1.12 SK1.12 SK2.12 | length 3024.6
  TopLayer w7.87: SK2.12@5130.15,1790 v1(5206.26,1790) ; v1(6410.41,1790) 6525.94,1790 6543.46,1772.48 6543.46,1714.23 6543.48,1665.78 ; 6543.46,1665.77 6543.46,489.33 v1(6670,362.8)
  BottomLayer w7.87: v1(5206.26,1790) v1(6410.41,1790) ; PL1.12@6528.03,362.8 v1(6670,362.8)
A15: PL1.11 SK1.11 SK2.11 | length 3044.8
  TopLayer w7.87: SK2.11@5130.15,1740 v1(5201.85,1740) ; v1(6410.41,1740) SK1.11@6480.68,1740 6489.42,1731.27 6524.29,1731.27 6528.9,1726.66 6528.9,1708.2 ; 6528.9,1671.8 6528.9,453.9 v1(6670,312.8) ; 6528.91,1671.82 6528.91,1708.18
  BottomLayer w7.87: v1(5201.85,1740) 5201.85,1741.85 5209.84,1749.84 ; 5210.77,1748.92 5232.83,1770.98 6379.43,1770.98 v1(6410.41,1740) ; PL1.11@6528.03,312.8 v1(6670,312.8)
A16: PL1.10 SK1.10 SK2.10 | length 3061.5
  TopLayer w7.87: SK2.10@5130.15,1690 v1(5201.65,1690) ; v1(6367.9,1707.9) 6385.8,1690 6491.82,1690 6501.66,1680.16 6501.66,1669.02 6514.33,1656.35 6514.33,417.2 v1(6670,261.54)
  BottomLayer w7.87: v1(5201.65,1690) 5206.26,1690 5272.68,1756.42 6319.39,1756.42 v1(6367.9,1707.9) ; PL1.10@6528.03,262.8 6528.66,262.17 6669.37,262.17 v1(6670,261.54)
A17: PL1.8 SK1.8 SK2.8 | length 3030.7
  TopLayer w7.87: v1(5020.31,1431.34) SK2.8@5020.31,1630.16 ; v1@6370.84,1013.48 v1(6370.84,1014.17) v1(6370.84,1429.58) SK1.8@6370.84,1630.16
  BottomLayer w7.87: v1(5020.31,1431.34) 5024.57,1431.34 5031.91,1438.68 6338.83,1438.68 6347.93,1429.58 v1(6370.84,1429.58) ; PL1.8@6370.16,154.92 v1@6370.16,1012.8
A18: PL1.7 SK1.7 SK2.7 | length 3028.7
  TopLayer w7.87: v1(4970.05,1438.43) 4970.31,1438.68 SK2.7@4970.31,1630.16 ; v1@6320.84,1012.37 6320.84,1458.84 6321,1459 6321,1630 SK1.7@6320.84,1630.16
  BottomLayer w7.87: v1(4970.05,1438.43) 4972.75,1438.43 4988.11,1453.78 6289.66,1453.78 6300.32,1464.44 v1(6321,1464.44) ; PL1.7@6320.16,154.92 6320.5,155.26 v1@6320.5,1012.03
  other v1: 6320.84,1014.17
A19: PL1.6 SK1.6 SK2.6 | length 3003.5
  TopLayer w7.87: v1(4920.31,1460.42) SK2.6@4920.31,1630.16 ; v1@6270.42,1013.9 6270.42,1429.58 6270,1430 6270,1629.32 SK1.6@6270.84,1630.16 ; 6270.42,1025.98 v1@6270.84,1025.56
  BottomLayer w7.87: v1@4920.75,1460.87 4923.5,1460.87 4932.79,1470.17 6233.1,1470.17 6246.24,1483.31 v1(6270,1483.31) ; PL1.6@6270.16,154.92 v1@6270.16,1012.8
  other v1: 6270.84,1014.17
A20: PL1.5 SK1.5 SK2.5 | length 2996.7
  TopLayer w7.87: v1(4870.31,1470.32) SK2.5@4870.31,1630.16 ; v1@6220.84,1010 6220.84,1449.55 6220.16,1450.24 6220.16,1485.51 6220.16,1629.47 SK1.5@6220.84,1630.16
  BottomLayer w7.87: v1(4870.31,1470.32) 4884.73,1484.73 6189.73,1484.73 6202.69,1497.69 6219.97,1497.69 v1(6220.16,1497.87) ; PL1.5@6220.16,154.92 6220.5,155.26 v1@6220.5,1009.66
  other v1: 6220.84,1014.17
A21: PL1.4 SK1.4 SK2.4 | length 2978.6
  TopLayer w7.87: SK2.4@4820.31,1630.16 4821.84,1628.63 v1(4821.84,1487.39) ; v1(6170.16,1014.17) 6170.16,1629.47 SK1.4@6170.84,1630.16 ; 6170.16,1025.98 v1@6170.84,1025.29
  BottomLayer w7.87: v1(4821.84,1487.39) 4822.41,1487.39 4834.32,1499.3 6150.41,1499.3 6166.94,1515.83 v1(6170.16,1515.83) ; PL1.4@6170.16,154.92 v1@6170.16,1012.8
A22: PL1.3 SK1.3 SK2.3 | length 2962.8
  TopLayer w7.87: v1(4770.31,1505.99) SK2.3@4770.31,1630.16 ; v1@6120,1012.45 6120,1629.32 SK1.3@6120.84,1630.16
  BottomLayer w7.87: v1(4770.31,1505.99) 4774.57,1505.99 4782.44,1513.87 6095.6,1513.87 v1(6120,1538.27) ; v1@6120.08,1012.37 6120.08,155 PL1.3@6120.16,154.92
  other v1: 6120,1014.17
A23: PL1.2 SK1.2 SK2.2 | length 2947.8
  TopLayer w7.87: SK2.2@4720.31,1630.16 4720.67,1629.8 v1(4720.67,1520.56) ; v1@6070.84,1013.48 SK1.2@6070.84,1630.16
  BottomLayer w7.87: v1(4720.67,1520.56) 4724.93,1520.56 4732.8,1528.43 6046.44,1528.43 v1(6070.84,1552.83) ; PL1.2@6070.16,154.92 v1@6070.16,1012.8
  other v1: 6070.84,1014.17
A24: PL1.1 SK1.1 SK2.1 | length 2931.5
  TopLayer w7.87: SK2.1@4670.31,1630.16 4671.06,1629.4 v1(4671.06,1536.56) ; v1@6020.84,1012.8 SK1.1@6020.84,1630.16
  BottomLayer w7.87: v1(4671.06,1536.56) 4675.32,1536.56 4681.77,1543 5996.44,1543 v1(6020.84,1567.4) ; PL1.1@6020.16,154.92 6020.5,155.26 v1@6020.5,1012.45
  other v1: 6020.84,1014.17
A25: PL1.68 SK1.68 SK2.68 | length 2895.2
  TopLayer w7.87: v1(4620.31,1567) SK2.68@4620.31,1630.16 ; SK1.68@5970.84,1630.16 5971,1630 v1(5971,1567.4) 5970.92,1567.32 v1@5970.92,1013.56
  BottomLayer w7.87: v1(4620.31,1567) 4624.57,1567 4632.57,1559 5958.51,1559 5966.91,1567.4 v1(5971,1567.4) ; PL1.68@5970.16,154.92 v1@5970.16,1012.8
  other v1: 5970.84,1014.17
ABRT: IC53.3 PL1.53 | length 2247.4
  BottomLayer w7.87: IC53.3@4393.23,2040 4446.48,2040 4469.06,2017.42 4469.06,1532.34 4650.77,1350.63 5098.99,1350.63 5210.77,1238.85 5210.77,793.54 5391.51,612.8 PL1.53@5504.41,612.8
CLK: IC59.2 IC59.5 IC71.1 PL1.67 | length 3852.8
  TopLayer w7.87: v1(5473,2832.79) 5500.46,2805.33 5500.46,2730.93 5297.21,2527.68 5297.21,856.42 5349.29,804.34 5349.29,698.42 5597.91,449.8 5597.91,311.52 5633.25,276.18 5900.89,276.18 v1(5920.16,295.45)
  BottomLayer w7.87: v1(5473,2832.79) 5475.77,2835.56 5496.62,2835.56 5551.37,2890.31 ; IC71.1@5516.23,3142.28 5516.23,3087 5558.09,3045.14 5558.09,2936.33 IC59.2@5560,2934.42 5551.37,2925.79 5551.37,2890.31 ; IC59.5@5710,2934.42 5710,2873.84 5680.93,2844.77 5596.91,2844.77 5551.37,2890.31 ; PL1.67@5920.16,154.92 v1(5920.16,295.45)
CLK1: R519.1 SK1.67 | length 146.4
  TopLayer w7.87: SK1.67@5920.84,1630.16 5921.98,1631.3 v1(5921.98,1711.2)
  BottomLayer w7.87: v1(5921.98,1711.2) R519.1@5982.1,1711.2 ; R519.1@5979.91,1713.39 R519.1@5982.1,1711.2 ; R519.1@5983.3,1710 R519.1@5982.1,1711.2
CLK2: R520.1 SK2.67 | length 2712
  TopLayer w7.87: SK2.67@4570.31,1630.16 4570.31,1572.39 4733.8,1408.9 5149.53,1408.9 5234.05,1493.42 5234.05,2573.23 5433.71,2772.89 5433.71,2781.72 v1(5436.72,2784.73)
  BottomLayer w7.87: v1(5436.72,2784.73) 5454.69,2766.77 5486.23,2766.77 5532.17,2812.71 5714.62,2812.71 5752.39,2850.48 R520.1@5907.06,2850.48
D0: J1.3 RN111.5 RN211.6 | length 3216
  BottomLayer w7.87: J1.3@333.64,3627.93 RN211.6@333.64,3254.02 336.73,3250.93 336.73,3229.57 346.07,3220.23 405.1,3220.23 425.08,3200.25 425.08,3170.66 531.8,3063.94 1431.13,3063.94 1475.88,3019.19 2720.31,3019.19 2930.36,3229.24 2945.83,3229.24 2950.76,3234.16 RN111.5@2950.76,3243.02
D1: J1.2 RN111.6 RN211.5 | length 3565.4
  BottomLayer w7.87: J1.2@235,3754.96 235,3737.64 302.14,3670.49 302.14,3250.58 297.22,3245.66 286.09,3245.66 261.16,3220.74 261.16,3123.23 286.64,3097.75 459.95,3097.75 460,3097.8 470.79,3097.8 519.21,3049.37 1424.13,3049.37 1468.88,3004.62 2726.34,3004.62 2931.72,3210 2972.09,3210 2980.19,3218.1 2980.19,3240.96 RN111.6@2982.25,3243.02
D2: J1.19 RN111.8 RN211.7 | length 3256.1
  TopLayer w7.87: v1(1399.13,3653.49) 1975.6,3653.49 ; v1(1975.6,3630.56) 1975.6,3653.49 ; v1(2307.64,3616.17) 2306.64,3615.17 2133.02,3615.17 2094.7,3653.49 1975.6,3653.49
  BottomLayer w7.87: RN211.7@365.14,3254.02 365.86,3254.74 365.86,3278.93 397.05,3310.12 551.38,3310.12 658.26,3417 1064.83,3417 1280.08,3632.25 1280.08,3709.63 1309.85,3739.39 1356.15,3739.39 1399.13,3696.41 v1(1399.13,3653.49) ; J1.19@1935,3625.04 1940.52,3630.56 v1(1975.6,3630.56) ; v1(2307.64,3616.17) 2327.17,3596.64 2344.87,3578.94 2435.52,3578.94 2454.94,3559.51 2476.81,3559.51 2498.66,3537.66 2570.43,3537.66 2822.15,3285.93 3033.13,3285.93 3045.24,3273.82 RN111.8@3045.24,3243.02
D3: J1.17 RN111.7 RN211.8 | length 4597
  BottomLayer w7.87: J1.17@1735,3625.04 1735,3607.72 1701.85,3574.57 1489.82,3574.57 1467.4,3596.99 1467.4,3612.99 1449.33,3631.05 1389.83,3631.05 1376.69,3644.2 1376.69,3698.25 1350.11,3724.82 1315.88,3724.82 1297.78,3706.72 1297.78,3622.72 1077.49,3402.43 664.3,3402.43 556.49,3294.62 407.71,3294.62 396.63,3283.55 396.63,3250.92 401.55,3246 412.69,3246 439.64,3219.04 439.64,3176.7 537.84,3078.5 1437.16,3078.5 1481.91,3033.75 2714.27,3033.75 2899.06,3218.54 2899.06,3232.93 2937.49,3271.36 3001.21,3271.36 3008.83,3263.75 3008.83,3247.94 RN111.7@3013.75,3243.02
D4: J1.20 RN112.5 RN212.5 | length 3146.3
  TopLayer w7.87: v1(1441.96,3592.22) 1443.71,3590.47 2073.39,3590.47 ; v1(2075.28,3631.05) 2073.39,3629.16 2073.39,3590.47 ; v1(2357.89,3605.94) 2355.41,3605.94 2339.94,3590.47 2073.39,3590.47
  BottomLayer w7.87: RN212.5@572.75,3262.88 572.75,3290.29 670.33,3387.87 1083.52,3387.87 1273.11,3577.45 1310.07,3577.45 1310.52,3577.01 1423.77,3577.01 1438.98,3592.22 v1(1441.96,3592.22) ; J1.20@2035,3754.96 2035,3737.64 2075.28,3697.36 v1(2075.28,3631.05) ; v1(2357.89,3605.94) 2429.12,3605.94 2460.48,3574.57 2557.97,3574.57 2832.04,3300.5 3187.16,3300.5 3204.76,3282.9 RN112.5@3204.76,3244.33
D5: J2.1 RN112.6 RN212.6 | length 3233.3
  TopLayer w7.87: v1(2297.64,3690) 2420.87,3690 v1(2467.64,3643.23)
  BottomLayer w7.87: RN212.6@604.25,3271.73 604.25,3301.19 676.37,3373.3 1091.9,3373.3 1278.6,3560 1828.69,3560 1890.06,3621.37 1890.06,3709 1911.93,3730.87 1972.13,3730.87 1985.77,3717.23 1985.77,3666.27 2061.57,3590.47 2201.23,3590.47 2297.64,3686.88 v1(2297.64,3690) ; v1(2467.64,3643.23) 2493.86,3643.23 2510,3627.09 J2.1@2510,3625.04 2539.42,3625.04 2583.23,3581.23 2583.23,3569.91 2838.07,3315.06 3193.19,3315.06 3193.25,3315.01 3198.13,3315.01 3236.25,3276.88 RN112.6@3236.25,3244.33
D6: J2.3 RN112.8 RN212.7 | length 3269.1
  BottomLayer w7.87: RN212.7@635.75,3262.88 635.75,3312.08 682.4,3358.73 1097.93,3358.73 1284.64,3545.43 1865.05,3545.43 1890.06,3570.44 2201.8,3570.44 2287.8,3656.44 2393.52,3656.44 2499.15,3762.08 2547.44,3762.08 2562.83,3746.7 2562.83,3669.68 2627.64,3604.87 2693.86,3604.87 J2.3@2710,3621.01 ; J2.3@2710,3625.04 J2.3@2710,3621.01 ; RN112.8@3299.24,3244.33 3297.6,3245.97 3297.6,3269.25 3222.71,3344.14 3205.31,3344.14 3205.26,3344.2 2851.29,3344.2 2710,3485.49 J2.3@2710,3621.01
D7: J2.2 RN112.7 RN212.8 | length 3218.2
  TopLayer w7.87: v1(2535.25,3739.64) 2536.69,3739.64 2571.16,3774.11 v1(2572.6,3774.11)
  BottomLayer w7.87: RN212.8@667.24,3264.54 667.24,3322.98 688.43,3344.17 1104.1,3344.17 1290.8,3530.87 1871.09,3530.87 1896.1,3555.88 2207.84,3555.88 2293.84,3641.88 2399.55,3641.88 2497.31,3739.64 v1(2535.25,3739.64) 2535.25,3737.71 2547.44,3725.51 2547.44,3664.46 2572.36,3639.55 ; 2572.36,3639.49 2598.62,3613.22 2598.62,3575.11 2844.1,3329.63 3199.23,3329.63 3199.28,3329.58 3211.88,3329.58 3267.75,3273.71 RN112.7@3267.75,3236.98 ; v1@2573.49,3774 2593.86,3774 2610,3757.86 J2.2@2610,3754.96
D8: J2.5 RN114.5 RN214.8 | length 2826.5
  BottomLayer w7.87: RN214.8@653.46,3443.86 1071.09,3443.86 1173.12,3545.89 1173.12,3788.12 1192.45,3807.45 1255.02,3807.45 1274.35,3788.12 1339.2,3788.12 1354.07,3802.99 2664.85,3802.99 2755.31,3712.53 2755.31,3675.4 2787.48,3643.23 2893.86,3643.23 2910,3627.09 2910,3607.72 2947.76,3569.96 RN114.5@2947.76,3474.02
D9: J2.6 RN114.6 RN214.7 | length 2870.6
  BottomLayer w7.87: RN214.7@645.02,3475.35 892.69,3475.35 1085,3667.66 1085,3727 1182.5,3824.5 1258.57,3824.5 1280.08,3802.99 1333.47,3802.99 1348.04,3817.56 2883.19,3817.56 2979.25,3721.5 ; RN114.6@2979.25,3474.02 2979.25,3721.5 ; J2.6@3010,3754.96 3010,3737.64 2993.86,3721.5 2979.25,3721.5